# EAGLE board buzzer_led_indicator (EAGLE 7.6.0)

Size 73.58 x 63.39 mm. Coordinates in mm from the lower left corner, seen from the top.
Outline: 0,0 56.82,0 56.82,53.33 0,53.33 0,0
Copper layers (1*16): Top 0.035mm / dielectric 1.5mm / Bottom 0.035mm
Design rules "default": minimum track width 10mil, minimum drill 24mil, track to track 8mil, track to pad 8mil, pad to pad 8mil, via to via 8mil, smd to smd 8mil, copper to edge 40mil, drill to drill 8mil, minimum pad ring 10mil, minimum via ring 8mil, stop-mask expansion 4mil, vias tented up to drill 0mil, thermal gap 10mil

## Footprints (pad centres in the part's own frame; a part is rotated, then mirrored left to right if it is on the bottom)
LED5MM = drill 0.813 octagon: A -1.27,0; K 1.27,0
PIEZO-22MM = drill 1 pad 2.54: P$1 -5,0; P$2 5,0
0207/10 = drill 0.813 octagon: 1 -5.08,0; 2 5.08,0
TL1105 = drill 1 pad 1.676: 1 -2.25,3.25; 2 2.25,3.25; 3 -2.25,-3.25; 4 2.25,-3.25
ARDUINO_UNO = drill 1.016 pad 1.88: 0 63.5,50.8; 1 60.96,50.8; 2 58.42,50.8; 3 55.88,50.8; 3.3V 35.56,2.54; 4 53.34,50.8; 5 50.8,50.8; 5V 38.1,2.54; 6 48.26,50.8; 7 45.72,50.8; 8 41.656,50.8; 9 39.116,50.8; 10 36.576,50.8; 11 34.036,50.8; 12 31.496,50.8; 13 28.956,50.8; A0 50.8,2.54; A1 53.34,2.54; A2 55.88,2.54; A3 58.42,2.54; A4 60.96,2.54; A5 63.5,2.54; AREF 23.876,50.8; GND 26.416,50.8; GND. 43.18,2.54; GND.. 40.64,2.54; I/OREF 30.48,2.54; N/C 27.94,2.54; RESET 33.02,2.54; SCL 18.796,50.8; SDA 21.336,50.8; VIN 45.72,2.54 | hole 3.2: 66.04,7.62; 66.04,35.56; 15.24,50.8; 13.97,2.54

## Placement (x,y rotation side)
Dp1_led  [LED5MM]  5,73.58 0 top  (outside the outline)
Dp2_led  [LED5MM]  5,86.28 0 top  (outside the outline)
Dp3_led  [LED5MM]  5,98.98 0 top  (outside the outline)
Dp4_led  [LED5MM]  5,187.88 0 top  (outside the outline)
Dreset_led  [LED5MM]  5,60.88 0 top
PIEZObuzzer_main  [PIEZO-22MM]  5,175.18 0 top  (outside the outline)
R1  1k‎Ω  [0207/10]  5,111.68 0 top  (outside the outline)
R2  1k‎Ω  [0207/10]  5,124.38 0 top  (outside the outline)
R3  1k‎Ω  [0207/10]  5,137.08 0 top  (outside the outline)
R4  1k‎Ω  [0207/10]  5,149.78 0 top  (outside the outline)
R5  1k‎Ω  [0207/10]  5,200.58 0 top  (outside the outline)
R6  1k‎Ω  [0207/10]  5,225.98 0 top  (outside the outline)
R8  1k‎Ω  [0207/10]  5,238.68 0 top  (outside the outline)
R9  1k‎Ω  [0207/10]  5,251.38 0 top  (outside the outline)
R10  1k‎Ω  [0207/10]  5,264.08 0 top  (outside the outline)
R11  1k‎Ω  [0207/10]  5,276.78 0 top  (outside the outline)
Sperson_1  [TL1105]  5,162.48 0 top  (outside the outline)
Sperson_2  [TL1105]  5,22.78 0 top
Sperson_3  [TL1105]  5,35.48 0 top
Sperson_4  [TL1105]  5,48.18 0 top
Sreset_button  [TL1105]  5,213.28 0 top  (outside the outline)
U1  [ARDUINO_UNO]  5,10.08 0 top

## Library data of the parts
Dp1_led Dp2_led Dp3_led Dp4_led Dreset_led PIEZObuzzer_main R1-R6 R8-R11 Sperson_1-Sperson_4 Sreset_button U1 = AUTODESK_CIRCUITS_BREADBOARD

## Nets
N$1: Dp4_led.A R5.2
N$2: Dp3_led.A R4.2
N$3: Dp2_led.A R3.2
N$4: PIEZObuzzer_main.P$2 U1.12
N$5: R10.2 Sperson_2.4 U1.7
N$6: Sperson_2.2
N$7: Sperson_2.1
N$8: R8.2 Sperson_4.4 U1.11
N$9: Sperson_4.2
N$10: Sperson_4.1
N$11: Sperson_1.3 Sperson_2.3 Sperson_3.3 Sperson_4.3 Sreset_button.3 U1.5V
N$12: Dreset_led.A R1.2
N$13: R6.2 Sreset_button.4 U1.3
N$14: Sreset_button.2
N$15: Sreset_button.1
N$16: Dp1_led.A R2.2
N$17: Dp1_led.K Dp2_led.K Dp3_led.K Dp4_led.K Dreset_led.K PIEZObuzzer_main.P$1 R6.1 R8.1 R9.1 R10.1 R11.1 U1.GND..
N$18: R9.2 Sperson_1.4 U1.5
N$19: Sperson_1.2
N$20: Sperson_1.1
N$21: R11.2 Sperson_3.4 U1.9
N$22: Sperson_3.2
N$23: Sperson_3.1
N$24: R5.1 U1.10
N$25: R1.1 U1.2
N$26: R2.1 U1.4
N$27: R3.1 U1.6
N$28: R4.1 U1.8

## Tracks (layer width: path | path; a pad name or v marks a point on that pad's centre or on a via)
N$1  (1 unrouted)
N$2  (1 unrouted)
N$3  (1 unrouted)
N$4  (1 unrouted)
N$5  (2 unrouted)
N$8  (2 unrouted)
N$11  (5 unrouted)
N$12  (1 unrouted)
N$13  (2 unrouted)
N$16  (1 unrouted)
N$17  (11 unrouted)
N$18  (2 unrouted)
N$21  (2 unrouted)
N$24  (1 unrouted)
N$25  (1 unrouted)
N$26  (1 unrouted)
N$27  (1 unrouted)
N$28  (1 unrouted)